# Altium PCB VIrtex_XC7vx690t_2ffg1927i_T_B.PcbDoc (part 3 of 5)
Units mm, origin at the board's own origin, x right, y up, seen from the top; angles counter-clockwise.
Board outline 230 x 148 mm, 12 copper layers (Top Layer 1, GND_IN_Layer, 1_V_IN_layer, 1.2_V_IN_layer, 1.8_V_IN_layer, 3.3_V_IN_layer, IN_Layer 6, IN_Layer 7, IN_Layer 8, IN_Layer 9, IN_Layer 10, Bottom Layer), stack 1.452 mm thick; 73 components, 655 nets, 2765 pads, 42 vias.
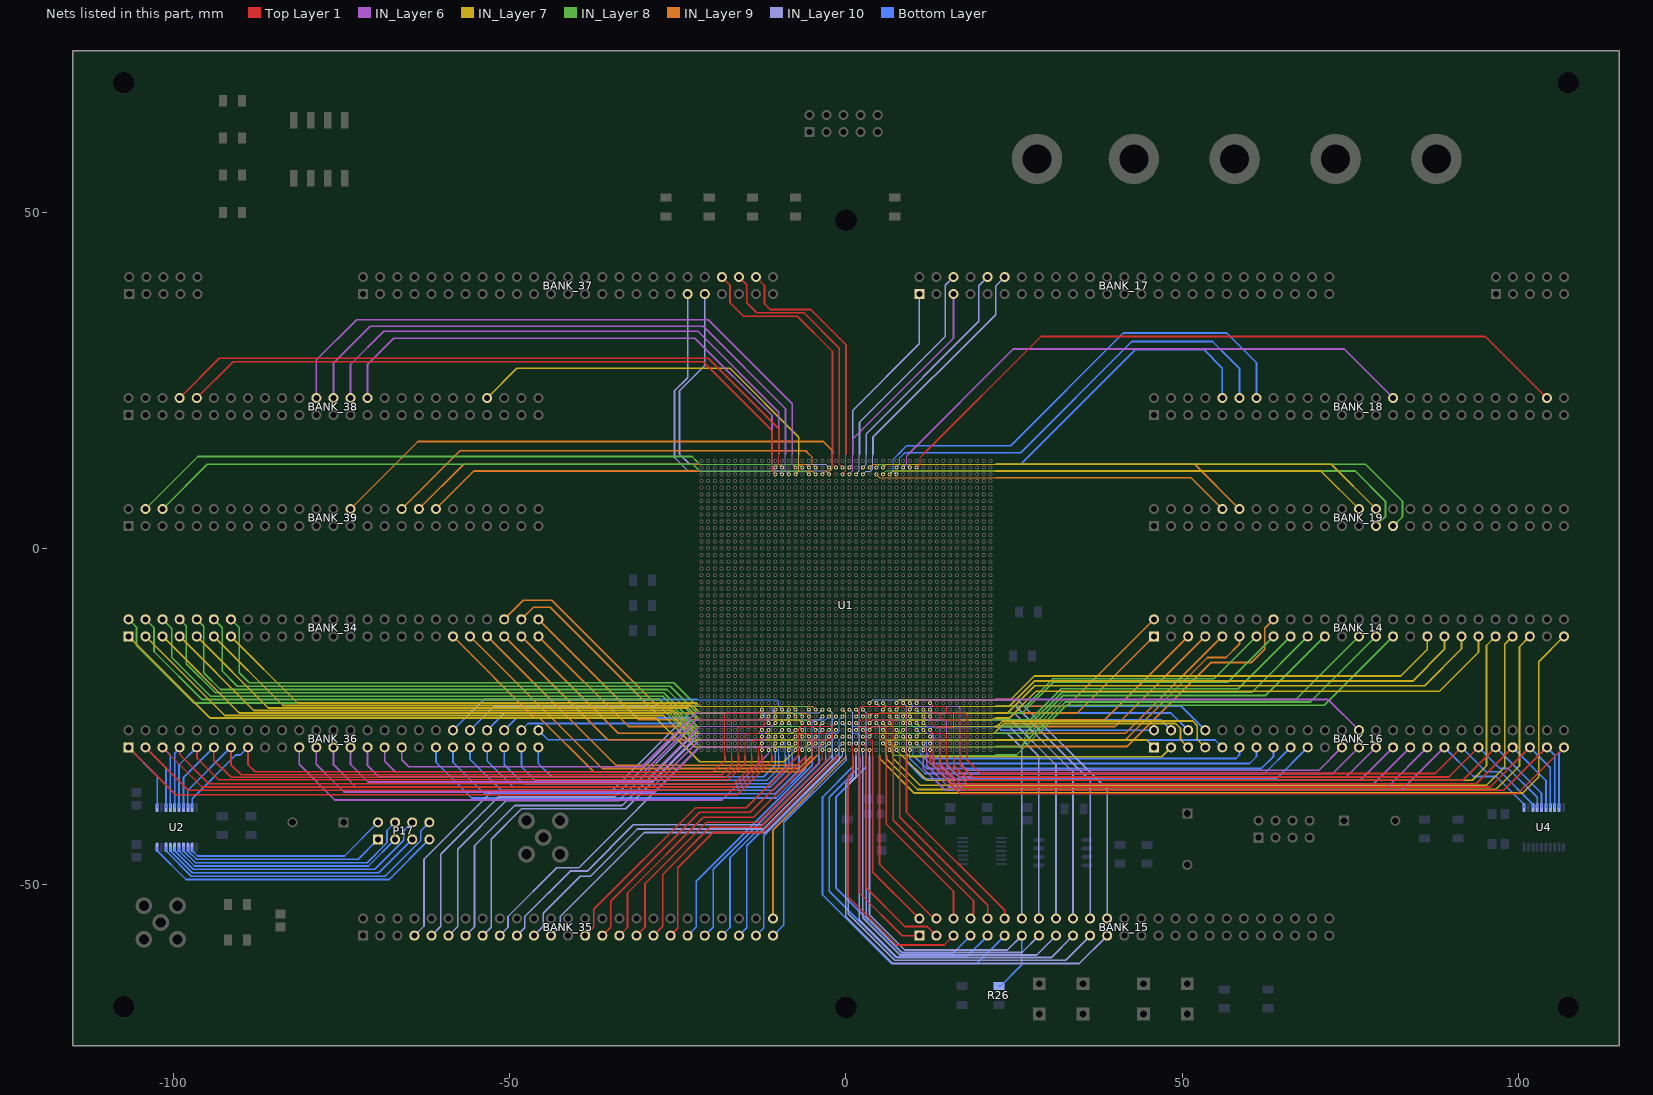
[diagram p13: the nets of this part, all layers, seen from the top]

## Via types
v1: diameter 0.8, hole 0.4, Top Layer 1 to Bottom Layer, 42 vias

## Nets (pads, with @x,y where several pads share a name; then routed paths per layer and width w, separated by ;. In a path a pad name is that pad's centre, name@x,y a point inside that pad or via, vN(x,y) a via of type N, cw(c..) or ccw(c..) an arc to the next point about the centre after c; other vN are vias at no path point) (continued)
AU26: BANK_15.24 U1.AU26 | length 60.3
  IN_Layer 10 w0.14: U1.AU26@3.5,-23 3.99,-22.51 22.3,-22.51
  IN_Layer 10 w0.254: 22.3,-22.51 25.51,-22.51 38.84,-35.84 BANK_15.24@38.84,-55.06
AU27: BANK_15.22 U1.AU27 | length 57.1
  IN_Layer 10 w0.14: U1.AU27@4.5,-23 4.99,-23.49 22.3,-23.49
  IN_Layer 10 w0.254: 22.3,-23.49 25.24,-23.49 36.3,-34.55 BANK_15.22@36.3,-55.06
AU28: BANK_14.13 U1.AU28 | length 60
  IN_Layer 8 w0.14: U1.AU28@5.5,-23 5.99,-23.49 22.3,-23.49
  IN_Layer 8 w0.254: 22.3,-23.49 26.704,-23.49 30.771,-19.423 54.717,-19.423 BANK_14.13@61.04,-13.1
AU30: BANK_14.33 U1.AU30 | length 84.2
  IN_Layer 7 w0.14: U1.AU30@7.5,-23 8.01,-22.49 22.3,-22.49
  IN_Layer 7 w0.254: 22.3,-22.49 24.51,-22.49 28,-19 82.5,-19 86.44,-15.06 BANK_14.33@86.44,-13.1
AU31: BANK_16.19 U1.AU31 | length 71.6
  Bottom Layer w0.14: U1.AU31@8.5,-23 9.01,-23.51 9.01,-30.9
  Bottom Layer w0.254: 9.01,-30.9 9.01,-31.76 11.5,-34.25 64.01,-34.25 BANK_16.19@68.66,-29.6
AU32: BANK_16.8 U1.AU32 | length 45.6
  Bottom Layer w0.14: U1.AU32@9.5,-23 9.99,-23.49 22.3,-23.49
  Bottom Layer w0.254: 22.3,-23.49 49.85,-23.49 BANK_16.8@53.42,-27.06
AU33: BANK_16.26 U1.AU33 | length 67.9
  IN_Layer 6 w0.14: U1.AU33@10.5,-23 11,-22.5 22.3,-22.5
  IN_Layer 6 w0.254: 22.3,-22.5 71.72,-22.5 BANK_16.26@76.28,-27.06
AU35: BANK_16.37 U1.AU35 U4.A2 | length 103.9
  Top Layer 1 w0.14: U1.AU35@12.5,-23 12.99,-23.49 14.74,-23.49 15,-23.75 15,-24.42 15.082,-24.503 17.753,-24.503 18.01,-24.76 18.01,-30.9
  Top Layer 1 w0.254: 18.01,-30.9 18.01,-31.51 20,-33.5 87.62,-33.5 BANK_16.37@91.52,-29.6
  Bottom Layer w0.254: BANK_16.37@91.52,-29.6 95.17,-33.25 97.318,-33.25 102.125,-38.057 U4.A2@102.125,-38.55
AV10: BANK_36.15 U1.AV10 U2.A8 | length 100
  Top Layer 1 w0.14: -17.996,-30.898 -17.996,-24.758 -17.738,-24.5 -13,-24.5 U1.AV10@-12.5,-24
  Top Layer 1 w0.254: BANK_36.15@-88.92,-29.6 -88.92,-32.183 -87.853,-33.25 -19.738,-33.25 -17.996,-31.508 -17.996,-30.898
  Bottom Layer w0.254: U2.A8@-97.225,-38.55 -97.225,-37.225 -90.75,-30.75 -90.07,-30.75 BANK_36.15@-88.92,-29.6
AV12: BANK_36.33 U1.AV12 | length 61.4
  IN_Layer 6 w0.14: -22.1,-24.49 -10.99,-24.49 U1.AV12@-10.5,-24
  IN_Layer 6 w0.254: BANK_36.33@-66.06,-29.6 -66.06,-31.44 -65,-32.5 -30.365,-32.5 -22.355,-24.49 -22.1,-24.49
AV13: BANK_36.40 U1.AV13 | length 51.9
  Bottom Layer w0.14: -22.1,-22.5 -10.307,-22.5 -9.99,-22.817 -9.99,-23.51 U1.AV13@-9.5,-24
  Bottom Layer w0.254: BANK_36.40@-58.44,-27.06 -53.88,-22.5 -22.1,-22.5
AV14: BANK_36.42 U1.AV14 | length 49.7
  Bottom Layer w0.14: -22.1,-23.51 -11.297,-23.51 -11,-23.807 -11,-24.193 -10.703,-24.49 -8.993,-24.49 -8.503,-24 U1.AV14@-8.5,-24
  Bottom Layer w0.254: BANK_36.42@-55.9,-27.06 -52.35,-23.51 -22.1,-23.51
AV15: BANK_34.13 U1.AV15 | length 88.5
  IN_Layer 7 w0.14: -22.1,-23.093 -21.703,-23.49 -8.01,-23.49 U1.AV15@-7.5,-24
  IN_Layer 7 w0.254: BANK_34.13@-91.46,-13.1 -81.554,-23.006 -22.187,-23.006 -22.1,-23.093
AV17: BANK_34.14 U1.AV17 | length 95.5
  IN_Layer 8 w0.14: -22.1,-23.49 -6.01,-23.49 U1.AV17@-5.5,-24
  IN_Layer 8 w0.254: BANK_34.14@-91.46,-10.56 -90.236,-11.784 -90.236,-18.514 -88.75,-20 -25.59,-20 -22.1,-23.49
AV18: BANK_34.46 U1.AV18 | length 54.2
  IN_Layer 9 w0.14: -22.1,-23.49 -5.01,-23.49 U1.AV18@-4.5,-24
  IN_Layer 9 w0.254: BANK_34.46@-50.82,-10.56 -48.01,-7.75 -43.75,-7.75 -28.01,-23.49 -22.1,-23.49
AV19: BANK_35.7 U1.AV19 | length 80.4
  IN_Layer 10 w0.14: -22.1,-24.49 -3.99,-24.49 U1.AV19@-3.5,-24
  IN_Layer 10 w0.254: BANK_35.7@-64.18,-57.6 -62.75,-56.17 -62.75,-46.25 -52.75,-36.25 -35,-36.25 -23.24,-24.49 -22.1,-24.49
AV20: BANK_35.19 U1.AV20 | length 66
  IN_Layer 10 w0.14: U1.AV20@-2.5,-24 -2.01,-24.49 -2.01,-30.76 -2.15,-30.9
  IN_Layer 10 w0.254: BANK_35.19@-48.94,-57.6 -47.75,-56.41 -47.75,-54.75 -41,-48 -38.5,-48 -31.626,-41.126 -12.376,-41.126 -2.15,-30.9
AV22: BANK_35.50 U1.AV22 | length 35.7
  IN_Layer 9 w0.14: U1.AV22@-0.5,-24 -0.01,-24.49 -0.01,-30.9 -0.01,-31.01
  IN_Layer 9 w0.254: BANK_35.50@-10.84,-55.06 -10.84,-41.84 -0.01,-31.01
AV23: BANK_15.23 U1.AV23 | length 74.9
  IN_Layer 10 w0.14: U1.AV23@0.5,-24 0.99,-24.49 0.99,-30.9
  IN_Layer 10 w0.254: 0.99,-30.9 0.99,-33.981 -0.021,-34.992 -0.021,-54.758 6.971,-61.75 34.69,-61.75 BANK_15.23@38.84,-57.6
AV24: BANK_15.19 U1.AV24 | length 66.9
  IN_Layer 10 w0.14: U1.AV24@1.5,-24 1.99,-24.49 1.99,-30.9
  IN_Layer 10 w0.254: 1.99,-30.9 1.99,-55.24 7.615,-60.865 30.495,-60.865 BANK_15.19@33.76,-57.6
AV25: BANK_15.15 U1.AV25 | length 59.9
  IN_Layer 10 w0.14: U1.AV25@2.5,-24 2.99,-24.49 2.99,-30.9
  IN_Layer 10 w0.254: 2.99,-30.9 2.99,-54.74 8.367,-60.117 26.163,-60.117 BANK_15.15@28.68,-57.6
AV28: BANK_14.2 U1.AV28 | length 45.9
  IN_Layer 9 w0.14: U1.AV28@5.5,-24 6.01,-23.49 22.3,-23.49
  IN_Layer 9 w0.254: 22.3,-23.49 32.87,-23.49 BANK_14.2@45.8,-10.56
AV29: BANK_14.15 U1.AV29 | length 62
  IN_Layer 8 w0.14: U1.AV29@6.5,-24 6.99,-24.49 22.3,-24.49
  IN_Layer 8 w0.254: 22.3,-24.49 26.233,-24.49 30.815,-19.908 56.772,-19.908 BANK_14.15@63.58,-13.1
AV30: BANK_14.35 U1.AV30 | length 87.1
  IN_Layer 7 w0.14: U1.AV30@7.5,-24 8.01,-23.49 22.3,-23.49
  IN_Layer 7 w0.254: 22.3,-23.49 24.26,-23.49 28,-19.75 84.25,-19.75 88.98,-15.02 BANK_14.35@88.98,-13.1
AV32: BANK_16.23 U1.AV32 | length 74.6
  IN_Layer 6 w0.14: U1.AV32@9.5,-24 9.99,-23.51 16.703,-23.51 16.99,-23.797 16.99,-30.9
  IN_Layer 6 w0.254: 16.99,-30.9 16.99,-31.99 18,-33 70.34,-33 BANK_16.23@73.74,-29.6
AV33: BANK_16.6 U1.AV33 | length 41.6
  Bottom Layer w0.14: U1.AV33@10.5,-24 11.01,-24.51 22.3,-24.51
  Bottom Layer w0.254: 22.3,-24.51 48.33,-24.51 BANK_16.6@50.88,-27.06
AV34: BANK_16.25 U1.AV34 | length 74.9
  IN_Layer 6 w0.14: U1.AV34@11.5,-24 11.99,-24.49 15.861,-24.49 16.01,-24.639 16.01,-30.9
  IN_Layer 6 w0.254: 16.01,-30.9 16.01,-32.361 17.149,-33.5 72.38,-33.5 BANK_16.25@76.28,-29.6
AV35: BANK_16.39 U1.AV35 U4.A3 | length 104.9
  Top Layer 1 w0.14: U1.AV35@12.5,-24 12.99,-24.49 13.74,-24.49 13.998,-24.748 13.998,-25.248 14.25,-25.5 16.75,-25.5 16.99,-25.74 16.99,-30.9
  Top Layer 1 w0.254: 16.99,-30.9 16.99,-32.24 18.75,-34 89.66,-34 BANK_16.39@94.06,-29.6
  Bottom Layer w0.254: BANK_16.39@94.06,-29.6 97.21,-32.75 98.5,-32.75 102.775,-37.025 U4.A3@102.775,-38.55
AW10: BANK_36.13 U1.AW10 U2.A7 | length 101.2
  Top Layer 1 w0.14: -17,-30.9 -17,-25.762 -16.738,-25.5 -13,-25.5 U1.AW10@-12.5,-25
  Top Layer 1 w0.254: BANK_36.13@-91.46,-29.6 -91.46,-32.183 -89.95,-33.693 -18.431,-33.693 -17,-32.262 -17,-30.9
  Bottom Layer w0.254: U2.A7@-97.875,-38.55 -97.875,-36.015 BANK_36.13@-91.46,-29.6
AW11: BANK_36.11 U1.AW11 U2.A6 | length 103.8
  Top Layer 1 w0.14: -15.996,-30.898 -15.996,-26.59 -15.914,-26.508 -12.315,-26.508 -12.01,-26.203 -12.01,-25.51 U1.AW11@-11.5,-25
  Top Layer 1 w0.254: BANK_36.11@-94,-29.6 -94,-31.5 -91.433,-34.067 -17.805,-34.067 -15.996,-32.258 -15.996,-30.898
  Bottom Layer w0.254: U2.A6@-98.525,-38.55 -98.525,-34.125 BANK_36.11@-94,-29.6
AW12: BANK_36.31 U1.AW12 | length 64.2
  IN_Layer 6 w0.14: -22.1,-25.5 -11,-25.5 U1.AW12@-10.5,-25
  IN_Layer 6 w0.254: BANK_36.31@-68.6,-29.6 -68.6,-31.65 -67.002,-33.248 -29.998,-33.248 -22.25,-25.5 -22.1,-25.5
AW14: BANK_36.44 U1.AW14 | length 46.8
  Bottom Layer w0.14: -22.1,-24.51 -12.297,-24.51 -12.01,-24.797 -12.01,-25.24 -11.76,-25.49 -8.99,-25.49 U1.AW14@-8.5,-25
  Bottom Layer w0.254: BANK_36.44@-53.36,-27.06 -50.81,-24.51 -22.1,-24.51
AW15: BANK_34.11 U1.AW15 | length 91.4
  IN_Layer 7 w0.14: -22.1,-24.093 -21.703,-24.49 -8.01,-24.49 U1.AW15@-7.5,-25
  IN_Layer 7 w0.254: BANK_34.11@-94,-13.1 -83.72,-23.38 -22.813,-23.38 -22.1,-24.093
AW16: BANK_34.12 U1.AW16 | length 97.3
  IN_Layer 8 w0.14: -22.1,-24.51 -6.99,-24.51 U1.AW16@-6.5,-25
  IN_Layer 8 w0.254: BANK_34.12@-94,-10.56 -92.75,-11.81 -92.75,-18.25 -90.5,-20.5 -26.11,-20.5 -22.1,-24.51
AW17: BANK_34.48 U1.AW17 | length 50.3
  IN_Layer 9 w0.14: -22.1,-24.51 -5.99,-24.51 U1.AW17@-5.5,-25
  IN_Layer 9 w0.254: BANK_34.48@-48.28,-10.56 -46.47,-8.75 -44,-8.75 -28.24,-24.51 -22.1,-24.51
AW19: BANK_35.9 U1.AW19 | length 77.9
  IN_Layer 10 w0.14: -22.1,-25.49 -3.99,-25.49 U1.AW19@-3.5,-25
  IN_Layer 10 w0.254: BANK_35.9@-61.64,-57.6 -60.25,-56.21 -60.25,-45.5 -51.75,-37 -34.5,-37 -22.99,-25.49 -22.1,-25.49
AW20: BANK_35.39 U1.AW20 | length 42.3
  Bottom Layer w0.14: -5,-30.9 -5,-25.807 -4.683,-25.49 -2.99,-25.49 U1.AW20@-2.5,-25
  Bottom Layer w0.254: BANK_35.39@-23.54,-57.6 -22.25,-56.31 -22.25,-49.5 -5,-32.25 -5,-30.9
AW21: BANK_35.41 U1.AW21 | length 41.5
  Bottom Layer w0.14: -4,-30.9 -4,-26.807 -3.683,-26.49 -2.297,-26.49 -1.99,-26.183 -1.99,-25.49 U1.AW21@-1.5,-25
  Bottom Layer w0.254: BANK_35.41@-21,-57.6 -21,-57.587 -19.75,-56.337 -19.75,-47.75 -4,-32 -4,-30.9
AW22: BANK_35.43 U1.AW22 | length 40.9
  Bottom Layer w0.14: -3,-30.9 -3,-27.807 -2.683,-27.49 -1.297,-27.49 -0.99,-27.183 -0.99,-25.49 U1.AW22@-0.5,-25
  Bottom Layer w0.254: BANK_35.43@-18.46,-57.6 -17.25,-56.39 -17.25,-46 -3,-31.75 -3,-30.9
AW24: BANK_15.12 U1.AW24 | length 46
  Top Layer 1 w0.14: U1.AW24@1.5,-25 1.99,-24.51 1.99,-23.817 2.297,-23.51 8.851,-23.51 8.99,-23.649 8.99,-30.9
  Top Layer 1 w0.254: 8.99,-30.9 8.99,-39.24 23.6,-53.85 BANK_15.12@23.6,-55.06
AW25: BANK_15.10 U1.AW25 | length 41.6
  Top Layer 1 w0.14: U1.AW25@2.5,-25 2.99,-24.51 7.851,-24.51 7.99,-24.649 7.99,-30.9
  Top Layer 1 w0.254: 7.99,-30.9 7.99,-39.99 21.06,-53.06 BANK_15.10@21.06,-55.06
AW26: BANK_15.20 U1.AW26 | length 55.9
  IN_Layer 10 w0.14: U1.AW26@3.5,-25 4,-24.5 22.3,-24.5
  IN_Layer 10 w0.254: 22.3,-24.5 25,-24.5 33.76,-33.26 BANK_15.20@33.76,-55.06
AW27: BANK_14.1 U1.AW27 | length 46.2
  IN_Layer 9 w0.14: U1.AW27@4.5,-25 5.01,-24.49 22.3,-24.49
  IN_Layer 9 w0.254: 22.3,-24.49 34.41,-24.49 BANK_14.1@45.8,-13.1
AW29: BANK_14.5 U1.AW29 | length 49.7
  IN_Layer 9 w0.14: U1.AW29@6.5,-25 6.99,-25.49 22.3,-25.49
  IN_Layer 9 w0.254: 22.3,-25.49 38.49,-25.49 BANK_14.5@50.88,-13.1
AW30: BANK_14.17 U1.AW30 | length 64
  IN_Layer 8 w0.14: U1.AW30@7.5,-25 8.01,-25.51 22.3,-25.51
  IN_Layer 8 w0.254: 22.3,-25.51 27.378,-25.51 31.996,-20.893 58.327,-20.893 BANK_14.17@66.12,-13.1
AW31: BANK_14.37 U1.AW31 | length 89
  IN_Layer 7 w0.14: U1.AW31@8.5,-25 8.99,-24.51 22.3,-24.51
  IN_Layer 7 w0.254: 22.3,-24.51 23.99,-24.51 28.077,-20.423 86.047,-20.423 91.52,-14.95 BANK_14.37@91.52,-13.1
AW32: BANK_16.4 U1.AW32 | length 39.7
  Bottom Layer w0.14: U1.AW32@9.5,-25 10.01,-25.51 22.3,-25.51
  Bottom Layer w0.254: 22.3,-25.51 46.79,-25.51 BANK_16.4@48.34,-27.06
AW34: BANK_16.27 U1.AW34 | length 76.7
  IN_Layer 6 w0.14: U1.AW34@11.5,-25 11.99,-25.49 14.74,-25.49 14.99,-25.74 14.99,-30.9
  IN_Layer 6 w0.254: 14.99,-30.9 14.99,-32.24 16.75,-34 74.42,-34 BANK_16.27@78.82,-29.6
AW35: BANK_16.41 U1.AW35 U4.A4 | length 105.5
  Top Layer 1 w0.14: U1.AW35@12.5,-25 12.99,-25.49 12.99,-26.24 13.26,-26.51 15.703,-26.51 16.01,-26.817 16.01,-30.9
  Top Layer 1 w0.254: 16.01,-30.9 16.01,-32.26 18.25,-34.5 91.7,-34.5 BANK_16.41@96.6,-29.6
  Bottom Layer w0.254: BANK_16.41@96.6,-29.6 103.425,-36.425 U4.A4@103.425,-38.55
AY11: BANK_36.1 U1.AY11 U2.A1 | length 117.2
  Top Layer 1 w0.14: U1.AY11@-11.5,-26 -11.01,-26.49 -11.01,-30.9
  Top Layer 1 w0.254: BANK_36.1@-106.7,-29.6 -99.643,-36.657 -16.157,-36.657 -11.01,-31.51 -11.01,-30.9
  Bottom Layer w0.254: BANK_36.1@-106.7,-29.6 -102.425,-33.875 U2.A1@-102.425,-38.55
AY12: BANK_36.29 U1.AY12 | length 67.4
  IN_Layer 6 w0.14: -22.1,-26.887 -21.703,-26.49 -10.99,-26.49 U1.AY12@-10.5,-26
  IN_Layer 6 w0.254: BANK_36.29@-71.14,-29.6 -71.14,-32.36 -69.5,-34 -29.213,-34 -22.1,-26.887
AY13: BANK_36.46 U1.AY13 | length 42.8
  Bottom Layer w0.14: -22.1,-26.5 -10,-26.5 U1.AY13@-9.5,-26
  Bottom Layer w0.254: BANK_36.46@-50.82,-27.06 -49.01,-25.25 -23.35,-25.25 -22.1,-26.5
AY14: BANK_36.37 U1.AY14 | length 69.9
  Bottom Layer w0.14: U1.AY14@-8.5,-26 -8,-26.5 -6.307,-26.5 -6,-26.807 -6,-30.9
  Bottom Layer w0.254: BANK_36.37@-60.98,-29.6 -60.98,-31.77 -55.626,-37.124 -10.403,-37.124 -6,-32.721 -6,-30.9
AY16: BANK_34.9 U1.AY16 | length 95.4
  IN_Layer 7 w0.14: -22.1,-25.093 -21.703,-25.49 -7.01,-25.49 U1.AY16@-6.5,-26
  IN_Layer 7 w0.254: BANK_34.9@-96.54,-13.1 -85.886,-23.754 -23.439,-23.754 -22.1,-25.093
AY17: BANK_34.10 U1.AY17 | length 101.5
  IN_Layer 8 w0.14: -22.1,-25.51 -5.99,-25.51 U1.AY17@-5.5,-26
  IN_Layer 8 w0.254: BANK_34.10@-96.54,-10.56 -95.5,-11.6 -95.5,-18.5 -93,-21 -26.61,-21 -22.1,-25.51
AY18: BANK_34.50 U1.AY18 | length 47.6
  IN_Layer 9 w0.14: -22.1,-25.49 -5.01,-25.49 U1.AY18@-4.5,-26
  IN_Layer 9 w0.254: BANK_34.50@-45.74,-10.56 -30.81,-25.49 -22.1,-25.49
AY19: BANK_35.11 U1.AY19 | length 75.4
  IN_Layer 10 w0.14: -22.1,-26.49 -3.99,-26.49 U1.AY19@-3.5,-26
  IN_Layer 10 w0.254: BANK_35.11@-59.1,-57.6 -57.75,-56.25 -57.75,-44.75 -50.5,-37.5 -33.75,-37.5 -22.74,-26.49 -22.1,-26.49
AY21: BANK_35.27 U1.AY21 | length 54.2
  Top Layer 1 w0.14: -7.15,-30.9 -7,-30.75 -7,-26.807 -6.683,-26.49 -1.99,-26.49 U1.AY21@-1.5,-26
  Top Layer 1 w0.254: BANK_35.27@-38.78,-57.6 -37.5,-56.32 -37.5,-53.682 -22.38,-38.562 -14.812,-38.562 -7.15,-30.9
AY22: BANK_35.49 U1.AY22 | length 36.3
  Bottom Layer w0.14: U1.AY22@-0.5,-26 0,-26.5 0,-30.9
  Bottom Layer w0.254: BANK_35.49@-10.84,-57.6 -9.25,-56.01 -9.25,-40.75 0,-31.5 0,-30.9
AY23: BANK_15.7 U1.AY23 | length 53.5
  Bottom Layer w0.14: U1.AY23@0.5,-26 0.99,-26.49 2.683,-26.49 3,-26.807 3,-31
  Bottom Layer w0.254: 3,-31 3,-32.5 -1.5,-37 -1.5,-50.5 8.25,-60.25 15.87,-60.25 BANK_15.7@18.52,-57.6
AY24: BANK_15.8 U1.AY24 | length 40.2
  Top Layer 1 w0.14: U1.AY24@1.5,-26 1.566,-25.934 1.873,-25.934 2.297,-25.51 6.703,-25.51 7.01,-25.817 7.01,-30.9
  Top Layer 1 w0.254: 7.01,-30.9 7.01,-40.429 18.948,-52.367 18.948,-54.295 18.52,-54.723 BANK_15.8@18.52,-55.06
AY26: BANK_15.18 U1.AY26 | length 53.6
  IN_Layer 10 w0.14: U1.AY26@3.5,-26 4,-25.5 22.3,-25.5
  IN_Layer 10 w0.254: 22.3,-25.5 24.5,-25.5 31.22,-32.22 BANK_15.18@31.22,-55.06
AY27: BANK_14.11 U1.AY27 | length 63.2
  IN_Layer 9 w0.14: U1.AY27@4.5,-26 4.99,-26.49 4.99,-28.351 5.139,-28.5 22.3,-28.5
  IN_Layer 9 w0.254: 22.3,-28.5 41.5,-28.5 53.75,-16.25 56.5,-16.25 58.5,-14.25 BANK_14.11@58.5,-13.1
AY28: BANK_14.7 U1.AY28 | length 53.7
  IN_Layer 9 w0.14: U1.AY28@5.5,-26 6,-26.5 22.3,-26.5
  IN_Layer 9 w0.254: 22.3,-26.5 40.02,-26.5 BANK_14.7@53.42,-13.1
AY29: BANK_14.19 U1.AY29 | length 67.9
  IN_Layer 8 w0.14: U1.AY29@6.5,-26 6.99,-26.49 22.3,-26.49
  IN_Layer 8 w0.254: 22.3,-26.49 27.043,-26.49 32.148,-21.385 60.375,-21.385 BANK_14.19@68.66,-13.1
AY31: BANK_14.39 U1.AY31 | length 92.3
  IN_Layer 7 w0.14: U1.AY31@8.5,-26 9.01,-25.49 21.703,-25.49 21.943,-25.25 22.3,-25.25
  IN_Layer 7 w0.254: 22.3,-25.25 24.25,-25.25 28.25,-21.25 88.25,-21.25 94.06,-15.44 BANK_14.39@94.06,-13.1
AY32: BANK_16.2 U1.AY32 | length 36.7
  Bottom Layer w0.14: U1.AY32@9.5,-26 10.01,-26.51 22.3,-26.51
  Bottom Layer w0.254: 22.3,-26.51 22.51,-26.51 23.06,-27.06 BANK_16.2@45.8,-27.06
AY33: BANK_16.7 U1.AY33 | length 46.3
  IN_Layer 7 w0.14: U1.AY33@10.5,-26 10.99,-26.49 22.3,-26.49
  IN_Layer 7 w0.254: 22.3,-26.49 22.481,-26.49 23.282,-25.689 51.54,-25.689 52.25,-26.399 52.25,-28.43 BANK_16.7@53.42,-29.6
AY34: BANK_16.29 U1.AY34 | length 78.6
  IN_Layer 6 w0.14: U1.AY34@11.5,-26 11.99,-26.49 13.683,-26.49 13.99,-26.797 13.99,-30.9
  IN_Layer 6 w0.254: 13.99,-30.9 13.99,-32.24 16.25,-34.5 76.46,-34.5 BANK_16.29@81.36,-29.6
B1: P17.7 U2.B1 | length 45.2
  Bottom Layer w0.254: U2.B1@-102.425,-44.45 -102.425,-44.962 -98.137,-49.25 -67.92,-49.25 P17.7@-61.96,-43.29
B2: P17.8 U2.B2 | length 45.4
  Bottom Layer w0.254: U2.B2@-101.125,-44.45 -101.125,-44.962 -97.337,-48.75 -68.55,-48.75 -63.25,-43.45 -63.25,-42.04 P17.8@-61.96,-40.75
B3: P17.5 U2.B3 | length 39.9
  Bottom Layer w0.254: U2.B3@-100.475,-44.45 -100.475,-44.962 -97.187,-48.25 -69.46,-48.25 P17.5@-64.5,-43.29
B4: P17.6 U2.B4 | length 40.7
  Bottom Layer w0.254: U2.B4@-99.825,-44.45 -99.825,-44.962 -97.037,-47.75 -70.09,-47.75 -65.75,-43.41 -65.75,-42 P17.6@-64.5,-40.75
B5: P17.3 U2.B5 | length 35.2
  Bottom Layer w0.254: U2.B5@-99.175,-44.45 -99.175,-44.962 -96.887,-47.25 -71,-47.25 P17.3@-67.04,-43.29
B6: P17.4 U2.B6 | length 36.3
  Bottom Layer w0.254: U2.B6@-98.525,-44.45 -98.525,-44.962 -96.737,-46.75 -71.191,-46.75 -68.25,-43.809 -68.25,-41.96 P17.4@-67.04,-40.75
B7: P17.1 U2.B7 | length 30.6
  Bottom Layer w0.254: U2.B7@-97.875,-44.45 -97.875,-44.962 -96.587,-46.25 -72.54,-46.25 P17.1@-69.58,-43.29
B8: P17.2 U2.B8 | length 30.6
  Bottom Layer w0.254: U2.B8@-97.225,-44.45 -97.225,-44.962 -96.437,-45.75 -74.58,-45.75 P17.2@-69.58,-40.75
B12: BANK_38.8 U1.B12 | length 101.8
  Top Layer 1 w0.14: U1.B12@-10.5,12 -10.01,12.49 -10.01,14
  Top Layer 1 w0.254: BANK_38.8@-99.08,22.34 -93.17,28.25 -20.5,28.25 -10.01,17.76 -10.01,14
B13: BANK_38.28 U1.B13 | length 84.1
  IN_Layer 6 w0.14: -10,14 -10,12.5 U1.B13@-9.5,12
  IN_Layer 6 w0.254: BANK_38.28@-73.68,22.34 -73.68,27.32 -68.75,32.25 -22,32.25 -10,20.25 -10,14
B15: BANK_38.24 U1.B15 | length 93.8
  IN_Layer 6 w0.14: -8,14 -8,12.5 U1.B15@-7.5,12
  IN_Layer 6 w0.254: BANK_38.24@-78.76,22.34 -78.76,27.99 -72.75,34 -20.5,34 -8,21.5 -8,14
B16: BANK_39.4 U1.B16 | length 101.6
  IN_Layer 8 w0.14: -22.1,12.85 -21.76,12.51 -7.01,12.51 U1.B16@-6.5,12
  IN_Layer 8 w0.254: BANK_39.4@-104.16,5.84 -96.353,13.647 -22.897,13.647 -22.1,12.85
B17: BANK_39.36 U1.B17 | length 61
  IN_Layer 9 w0.14: -22.1,12.51 -6.01,12.51 U1.B17@-5.5,12
  IN_Layer 9 w0.254: BANK_39.36@-63.52,5.84 -56.85,12.51 -22.1,12.51
B18: BANK_39.34 U1.B18 | length 66.8
  IN_Layer 9 w0.14: -5.5,14 -5.01,13.51 -5.01,12.51 U1.B18@-4.5,12
  IN_Layer 9 w0.254: BANK_39.34@-66.06,5.84 -57.4,14.5 -6,14.5 -5.5,14
B20: BANK_37.41 U1.B20 | length 48.4
  IN_Layer 10 w0.14: -22.1,12.5 -3,12.5 U1.B20@-2.5,12
  IN_Layer 10 w0.254: -22.1,12.5 -23.25,12.5 -24.75,14 -24.75,23.432 -21,27.182 BANK_37.41@-21,37.8
B21: BANK_37.44 U1.B21 | length 40.1
  Top Layer 1 w0.14: -2,14 -2,12.5 U1.B21@-1.5,12
  Top Layer 1 w0.254: BANK_37.44@-18.46,40.34 -17.25,39.13 -17.25,36.5 -15.25,34.5 -7.25,34.5 -2,29.25 -2,14
B22: BANK_37.46 U1.B22 | length 38.8
  Top Layer 1 w0.14: -1,14 -1,12.5 U1.B22@-0.5,12
  Top Layer 1 w0.254: BANK_37.46@-15.92,40.34 -14.75,39.17 -14.75,36.5 -13.25,35 -6.25,35 -1,29.75 -1,14
B23: BANK_17.1 U1.B23 | length 30.1
  IN_Layer 10 w0.14: U1.B23@0.5,12 1,12.5 1,14
  IN_Layer 10 w0.254: 1,14 1,20.488 10.9,30.389 BANK_17.1@10.9,37.8
B25: BANK_17.10 U1.B25 | length 36
  IN_Layer 10 w0.14: U1.B25@2.5,12 3,12.5 3,14
  IN_Layer 10 w0.254: 3,14 3,17 19.75,33.75 19.75,39.03 BANK_17.10@21.06,40.34
B26: BANK_19.12 U1.B26 | length 58
  IN_Layer 9 w0.14: U1.B26@3.5,12 3.99,12.49 22.3,12.49
  IN_Layer 9 w0.254: 22.3,12.49 51.85,12.49 BANK_19.12@58.5,5.84
B27: BANK_19.29 U1.B27 | length 85
  IN_Layer 8 w0.14: U1.B27@4.5,12 5,12.5 22.297,12.5
  IN_Layer 8 w0.254: 22.297,12.5 77.25,12.5 82.75,7 82.75,4.69 BANK_19.29@81.36,3.3
B28: BANK_19.28 U1.B28 | length 76.3
  IN_Layer 7 w0.14: U1.B28@5.5,12 6,12.5 22.25,12.5
  IN_Layer 7 w0.254: 22.25,12.5 72.16,12.5 BANK_19.28@78.82,5.84
B30: BANK_18.12 U1.B30 | length 65.4
  Bottom Layer w0.14: U1.B30@7.5,12 8.01,12.51 8.01,13.465 8.545,14
  Bottom Layer w0.254: 8.545,14 8.766,14.221 25.971,14.221 42.5,30.75 54.5,30.75 56.912,28.338 58.5,26.75 BANK_18.12@58.5,22.34
B31: BANK_18.10 U1.B31 | length 60.3
  Bottom Layer w0.14: U1.B31@8.5,12 8.99,12.49 22.3,12.49
  Bottom Layer w0.254: 22.3,12.49 25.99,12.49 43,29.5 53.25,29.5 55.96,26.79 BANK_18.10@55.96,22.34
B32: BANK_18.30 U1.B32 | length 83.9
  IN_Layer 6 w0.14: 9.25,14 9.01,13.76 9.01,12.49 U1.B32@9.5,12
  IN_Layer 6 w0.254: 9.25,14 24.878,29.628 74.072,29.628 BANK_18.30@81.36,22.34
B33: BANK_18.48 U1.B33 | length 106.2
  Top Layer 1 w0.14: U1.B33@10.5,12 11.01,12.51 11.01,13.51 11.5,14
  Top Layer 1 w0.254: 11.5,14 29,31.5 95.06,31.5 BANK_18.48@104.22,22.34
BA10: BANK_36.9 U1.BA10 U2.A5 | length 102.6
  Top Layer 1 w0.14: -15.01,-30.9 -15.01,-27.817 -14.683,-27.49 -13.023,-27.49 -12.533,-27 U1.BA10@-12.5,-27
  Top Layer 1 w0.254: BANK_36.9@-96.54,-29.6 -96.507,-29.633 -96.507,-31.243 -93.309,-34.441 -17.466,-34.441 -15.01,-31.985 -15.01,-30.9
  Bottom Layer w0.254: U2.A5@-99.175,-38.55 -99.175,-32.235 BANK_36.9@-96.54,-29.6
BA11: BANK_36.27 U1.BA11 | length 69
  IN_Layer 6 w0.14: -22.1,-27.85 -21.74,-27.49 -11.99,-27.49 U1.BA11@-11.5,-27
  IN_Layer 6 w0.254: BANK_36.27@-73.68,-29.6 -73.68,-32.14 -71.07,-34.75 -29,-34.75 -22.1,-27.85
BA13: BANK_36.48 U1.BA13 | length 40
  Bottom Layer w0.14: -22.1,-27.5 -10,-27.5 U1.BA13@-9.5,-27
  Bottom Layer w0.254: BANK_36.48@-48.28,-27.06 -47.283,-26.063 -24.187,-26.063 -22.75,-27.5 -22.1,-27.5
BA14: BANK_36.39 U1.BA14 | length 64.2
  Bottom Layer w0.14: U1.BA14@-8.5,-27 -8,-27.5 -7.082,-27.5 -7,-27.582 -7,-30.9
  Bottom Layer w0.254: BANK_36.39@-58.44,-29.6 -58.44,-31.81 -53.75,-36.5 -10.496,-36.5 -7,-33.004 -7,-30.9
BA15: BANK_34.7 U1.BA15 | length 97.7
  IN_Layer 7 w0.14: -22.1,-27.49 -7.99,-27.49 U1.BA15@-7.5,-27
  IN_Layer 7 w0.254: BANK_34.7@-99.08,-13.1 -88.052,-24.128 -25.622,-24.128 -22.26,-27.49 -22.1,-27.49
BA16: BANK_34.8 U1.BA16 | length 102.7
  IN_Layer 8 w0.14: -22.1,-26.474 -22.084,-26.49 -7.01,-26.49 U1.BA16@-6.5,-27
  IN_Layer 8 w0.254: BANK_34.8@-99.08,-10.56 -98.083,-11.557 -98.083,-17.167 -93.75,-21.5 -27.074,-21.5 -22.1,-26.474
BA18: BANK_34.49 U1.BA18 | length 47
  IN_Layer 9 w0.14: -22.1,-26.49 -5.01,-26.49 U1.BA18@-4.5,-27
  IN_Layer 9 w0.254: BANK_34.49@-45.74,-13.1 -32.35,-26.49 -22.1,-26.49
BA19: BANK_35.13 U1.BA19 | length 72.8
  IN_Layer 10 w0.14: -22.1,-27.51 -4.01,-27.51 U1.BA19@-3.5,-27
  IN_Layer 10 w0.254: BANK_35.13@-56.56,-57.6 -55.25,-56.29 -55.25,-44.25 -49.25,-38.25 -33.25,-38.25 -22.51,-27.51 -22.1,-27.51
BA20: BANK_35.29 U1.BA20 | length 50.5
  Top Layer 1 w0.14: -6,-31 -6,-27.807 -5.683,-27.49 -2.99,-27.49 U1.BA20@-2.5,-27
  Top Layer 1 w0.254: BANK_35.29@-36.24,-57.6 -35,-56.36 -35,-52.5 -21.75,-39.25 -14.25,-39.25 -6,-31
BA21: BANK_35.31 U1.BA21 | length 49.7
  Top Layer 1 w0.14: -5,-31 -5,-28.807 -4.683,-28.49 -2.297,-28.49 -1.99,-28.183 -1.99,-27.49 U1.BA21@-1.5,-27
  Top Layer 1 w0.254: BANK_35.31@-33.7,-57.6 -32.5,-56.4 -32.5,-51.25 -21.25,-40 -13.75,-40 -5,-31.25 -5,-31
BA23: BANK_15.9 U1.BA23 | length 55.8
  Bottom Layer w0.14: U1.BA23@0.5,-27 0.99,-27.49 1.683,-27.49 2,-27.807 2,-31.25
  Bottom Layer w0.254: 2,-31.25 2,-32.5 -2.5,-37 -2.5,-51 7.278,-60.778 17.882,-60.778 BANK_15.9@21.06,-57.6
BA24: BANK_15.6 U1.BA24 | length 37.3
  Top Layer 1 w0.14: U1.BA24@1.5,-27 1.99,-26.51 5.851,-26.51 5.99,-26.649 5.99,-30.9
  Top Layer 1 w0.254: 5.99,-30.9 5.99,-40.99 15.98,-50.98 BANK_15.6@15.98,-55.06
BA25: BANK_15.4 U1.BA25 | length 33.9
  Top Layer 1 w0.14: U1.BA25@2.5,-27 2.99,-27.49 4.851,-27.49 4.99,-27.629 4.99,-30.9
  Top Layer 1 w0.254: 4.99,-30.9 4.99,-46.99 12.704,-54.704 12.747,-54.704 13.103,-55.06 BANK_15.4@13.44,-55.06
BA26: BANK_15.16 U1.BA26 | length 51.4
  IN_Layer 10 w0.14: U1.BA26@3.5,-27 4,-26.5 22.3,-26.5
  IN_Layer 10 w0.254: 22.3,-26.5 24.25,-26.5 28.68,-30.93 BANK_15.16@28.68,-55.06
BA28: BANK_14.9 U1.BA28 | length 56.6
  IN_Layer 9 w0.14: U1.BA28@5.5,-27 5.583,-27 6.083,-27.5 22.3,-27.5
  IN_Layer 9 w0.254: 22.3,-27.5 41.56,-27.5 BANK_14.9@55.96,-13.1
BA30: BANK_14.21 U1.BA30 | length 69.9
  IN_Layer 8 w0.14: U1.BA30@7.5,-27 8,-27.5 22.3,-27.5
  IN_Layer 8 w0.254: 22.3,-27.5 26.678,-27.5 32.301,-21.877 62.423,-21.877 BANK_14.21@71.2,-13.1
BA31: BANK_14.49 U1.BA31 | length 131
  IN_Layer 7 w0.14: 4.99,-30.9 4.99,-27.572 5.072,-27.49 8.01,-27.49 U1.BA31@8.5,-27
  IN_Layer 7 w0.254: 4.99,-30.9 4.99,-31.24 10.154,-36.404 100.602,-36.404 100.759,-36.247 103,-34.006 103,-16.86 BANK_14.49@106.76,-13.1
BA33: BANK_16.9 U1.BA33 | length 46.8
  Bottom Layer w0.14: U1.BA33@10.5,-27 11.01,-27.51 12.76,-27.51 13.01,-27.76 13.01,-28.203 13.297,-28.49 13.74,-28.49 13.75,-28.5 22.3,-28.5
  Bottom Layer w0.254: 22.3,-28.5 54.86,-28.5 BANK_16.9@55.96,-29.6
BA34: BANK_16.31 U1.BA34 | length 80.6
  IN_Layer 6 w0.14: U1.BA34@11.5,-27 11.99,-27.49 12.683,-27.49 13.01,-27.817 13.01,-30.9
  IN_Layer 6 w0.254: 13.01,-30.9 13.01,-32.26 15.75,-35 78.5,-35 BANK_16.31@83.9,-29.6
BA35: BANK_16.43 U1.BA35 U4.A5 | length 105.7
  Top Layer 1 w0.14: U1.BA35@12.5,-27 13.01,-27.51 14.76,-27.51 15.01,-27.76 15.01,-30.9
  Top Layer 1 w0.254: 15.01,-30.9 15.01,-32.026 17.984,-35 93.74,-35 BANK_16.43@99.14,-29.6
  Bottom Layer w0.254: BANK_16.43@99.14,-29.6 104.075,-34.535 U4.A5@104.075,-38.55
BB10: BANK_36.7 U1.BB10 U2.A4 | length 103.7
  Top Layer 1 w0.14: -14,-30.9 -14,-28.807 -13.703,-28.51 -13.01,-28.51 U1.BB10@-12.5,-28
  Top Layer 1 w0.254: BANK_36.7@-99.08,-29.6 -99.08,-30.67 -94.752,-34.998 -16.629,-34.998 -14,-32.369 -14,-30.9
  Bottom Layer w0.254: U2.A4@-99.825,-38.55 -99.825,-30.454 -99.08,-29.709 BANK_36.7@-99.08,-29.6
BB11: BANK_36.25 U1.BB11 | length 71.8
  IN_Layer 6 w0.14: -22.1,-28.85 -21.74,-28.49 -12.051,-28.49 -11.561,-28 U1.BB11@-11.5,-28
  IN_Layer 6 w0.254: BANK_36.25@-76.22,-29.6 -76.22,-32.14 -74.54,-33.82 -72.86,-35.5 -28.75,-35.5 -22.1,-28.85
BB12: BANK_36.50 U1.BB12 | length 36
  Bottom Layer w0.14: -22.1,-28.49 -10.99,-28.49 U1.BB12@-10.5,-28
  Bottom Layer w0.254: BANK_36.50@-45.74,-27.06 -44.31,-28.49 -22.1,-28.49
BB13: BANK_36.45 U1.BB13 | length 51.3
  Bottom Layer w0.14: U1.BB13@-9.5,-28 -9,-28.5 -9,-30.9
  Bottom Layer w0.254: BANK_36.45@-50.82,-29.6 -50.82,-32.18 -48,-35 -11.5,-35 -9,-32.5 -9,-30.9
BB15: BANK_34.5 U1.BB15 | length 100.7
  IN_Layer 7 w0.14: -22.1,-28.5 -8,-28.5 U1.BB15@-7.5,-28
  IN_Layer 7 w0.254: BANK_34.5@-101.62,-13.1 -90.218,-24.502 -26.235,-24.502 -25.068,-25.67 -22.237,-28.5 -22.1,-28.5
BB16: BANK_34.6 U1.BB16 | length 104.9
  IN_Layer 8 w0.14: -22.1,-27.15 -21.76,-27.49 -7.01,-27.49 U1.BB16@-6.5,-28
  IN_Layer 8 w0.254: BANK_34.6@-101.62,-10.56 -100.25,-11.93 -100.25,-16.25 -94.5,-22 -27.25,-22 -22.1,-27.15
BB17: BANK_34.47 U1.BB17 | length 49
  IN_Layer 9 w0.14: -22.1,-27.49 -6.01,-27.49 U1.BB17@-5.5,-28
  IN_Layer 9 w0.254: BANK_34.47@-48.28,-13.1 -33.89,-27.49 -22.1,-27.49
BB18: BANK_34.45 U1.BB18 | length 52.9
  IN_Layer 9 w0.14: -22.1,-28.49 -4.99,-28.49 U1.BB18@-4.5,-28
  IN_Layer 9 w0.254: BANK_34.45@-50.82,-13.1 -35.43,-28.49 -22.1,-28.49
BB20: BANK_35.15 U1.BB20 | length 71.4
  IN_Layer 10 w0.14: -22.1,-28.49 -2.99,-28.49 U1.BB20@-2.5,-28
  IN_Layer 10 w0.254: BANK_35.15@-54.02,-57.6 -52.75,-56.33 -52.75,-43.25 -48.25,-38.75 -32.75,-38.75 -22.49,-28.49 -22.1,-28.49
BB21: BANK_35.45 U1.BB21 | length 35.6
  Bottom Layer w0.14: -2,-30.9 -2,-28.5 U1.BB21@-1.5,-28
  Bottom Layer w0.254: BANK_35.45@-15.92,-57.6 -14.75,-56.43 -14.75,-44.25 -2,-31.5 -2,-30.9
BB22: BANK_35.47 U1.BB22 | length 34.9
  Bottom Layer w0.14: -1,-30.9 -1,-28.5 U1.BB22@-0.5,-28
  Bottom Layer w0.254: BANK_35.47@-13.38,-57.6 -12.25,-56.47 -12.25,-42.75 -1,-31.5 -1,-30.9
BB23: BANK_15.11 U1.BB23 | length 58.6
  Bottom Layer w0.14: U1.BB23@0.5,-28 1,-28.5 1,-31.25
  Bottom Layer w0.254: 1,-31.25 1,-32.5 -3.5,-37 -3.5,-51.5 6.75,-61.75 19.45,-61.75 BANK_15.11@23.6,-57.6
BB25: BANK_15.2 U1.BB25 | length 31
  Top Layer 1 w0.14: U1.BB25@2.5,-28 2.99,-28.49 3.851,-28.49 3.99,-28.629 3.99,-30.9
  Top Layer 1 w0.254: 3.99,-30.9 3.99,-48.15 BANK_15.2@10.9,-55.06
BB26: BANK_15.14 U1.BB26 | length 49.2
  IN_Layer 10 w0.14: U1.BB26@3.5,-28 4,-27.5 22.3,-27.5
  IN_Layer 10 w0.254: 22.3,-27.5 24,-27.5 26.14,-29.64 BANK_15.14@26.14,-55.06
BB28: BANK_14.25 U1.BB28 | length 77.4
  IN_Layer 8 w0.14: U1.BB28@5.5,-28 6,-28.5 22.3,-28.5
  IN_Layer 8 w0.254: 22.3,-28.5 26.322,-28.5 32.344,-22.478 66.902,-22.478 BANK_14.25@76.28,-13.1
BB30: BANK_14.45 U1.BB30 | length 121.7
  IN_Layer 7 w0.14: 6.01,-30.9 6.01,-28.797 6.297,-28.51 6.99,-28.51 U1.BB30@7.5,-28
  IN_Layer 7 w0.254: 6.01,-30.9 6.01,-31.26 10.623,-35.873 96.627,-35.873 100.137,-32.363 100.137,-14.643 BANK_14.45@101.68,-13.1
BB31: BANK_16.1 U1.BB31 | length 38
  IN_Layer 7 w0.14: U1.BB31@8.5,-28 9.01,-28.51 22.3,-28.51
  IN_Layer 7 w0.254: 22.3,-28.51 44.71,-28.51 BANK_16.1@45.8,-29.6
BB32: BANK_16.11 U1.BB32 | length 52.7
  Bottom Layer w0.14: U1.BB32@9.5,-28 10.01,-28.51 11.703,-28.51 11.99,-28.797 11.99,-30.49 12.4,-30.9
  Bottom Layer w0.254: 12.4,-30.9 12.75,-31.25 58,-31.25 58.5,-30.75 BANK_16.11@58.5,-29.6
BB33: BANK_16.5 U1.BB33 | length 43.6
  IN_Layer 7 w0.14: U1.BB33@10.5,-28 11,-27.5 22,-27.5 22.3,-27.2
  IN_Layer 7 w0.254: 22.3,-27.2 23.437,-26.063 49.04,-26.063 49.75,-26.773 49.75,-28.47 BANK_16.5@50.88,-29.6
BB35: BANK_16.45 U1.BB35 U4.A6 | length 106.8
  Top Layer 1 w0.14: U1.BB35@12.5,-28 12.99,-28.49 13.74,-28.49 14.01,-28.76 14.01,-30.9
  Top Layer 1 w0.254: 14.01,-30.9 14.01,-32.01 17.5,-35.5 95.78,-35.5 BANK_16.45@101.68,-29.6
  Bottom Layer w0.254: BANK_16.45@101.68,-29.6 104.725,-32.645 U4.A6@104.725,-38.55
BC10: BANK_36.5 U1.BC10 U2.A3 | length 105.2
  Top Layer 1 w0.14: -13,-30.9 -13,-29.5 U1.BC10@-12.5,-29
  Top Layer 1 w0.254: BANK_36.5@-101.642,-29.622 -95.766,-35.498 -16.498,-35.498 -13,-32 -13,-30.9
  Bottom Layer w0.254: BANK_36.5@-101.62,-29.6 -100.475,-30.745 U2.A3@-100.475,-38.55
BC12: BANK_36.23 U1.BC12 | length 75.5
  IN_Layer 6 w0.14: -22.1,-29.907 -21.683,-29.49 -10.99,-29.49 U1.BC12@-10.5,-29
  IN_Layer 6 w0.254: BANK_36.23@-78.76,-29.6 -78.76,-32.14 -74.65,-36.25 -28.443,-36.25 -22.1,-29.907
BC13: BANK_36.47 U1.BC13 | length 46.7
  Bottom Layer w0.14: -10,-30.9 -10,-29.5 U1.BC13@-9.5,-29
  Bottom Layer w0.254: BANK_36.47@-48.28,-29.6 -48.25,-29.63 -48.25,-32.5 -46.25,-34.5 -11.75,-34.5 -10,-32.75 -10,-30.9
BC14: BANK_36.41 U1.BC14 | length 57.1
  Bottom Layer w0.14: U1.BC14@-8.5,-29 -8.01,-29.49 -8.01,-30.9
  Bottom Layer w0.254: BANK_36.41@-55.9,-29.6 -55.9,-31.35 -51.25,-36 -10.844,-36 -8.01,-33.166 -8.01,-30.9
BC15: BANK_34.3 U1.BC15 | length 103.7
  IN_Layer 7 w0.14: -22.1,-29.51 -8.01,-29.51 U1.BC15@-7.5,-29
  IN_Layer 7 w0.254: BANK_34.3@-104.16,-13.1 -92.384,-24.876 -27.124,-24.876 -22.49,-29.51 -22.1,-29.51
BC17: BANK_34.43 U1.BC17 | length 58
  IN_Layer 9 w0.14: -6,-30.9 -6,-29.5 U1.BC17@-5.5,-29
  IN_Layer 9 w0.254: BANK_34.43@-53.36,-13.1 -34.21,-32.25 -7.25,-32.25 -6,-31 -6,-30.9
BC18: BANK_34.41 U1.BC18 | length 61.8
  IN_Layer 9 w0.14: -5.15,-30.9 -5.01,-30.76 -5.01,-29.51 U1.BC18@-4.5,-29
  IN_Layer 9 w0.254: BANK_34.41@-55.9,-13.1 -36.25,-32.75 -7,-32.75 -5.15,-30.9
BC19: BANK_34.39 U1.BC19 | length 65.6
  IN_Layer 9 w0.14: -4.4,-30.9 -4.01,-30.51 -4.01,-29.51 U1.BC19@-3.5,-29
  IN_Layer 9 w0.254: BANK_34.39@-58.44,-13.1 -46.29,-25.25 -45.5,-25.25 -37.5,-33.25 -6.75,-33.25 -4.4,-30.9
BC20: BANK_35.17 U1.BC20 | length 61.8
  IN_Layer 10 w0.14: -22.1,-29.907 -21.688,-29.495 -3.745,-29.495 -3.74,-29.49 -2.99,-29.49 U1.BC20@-2.5,-29
  IN_Layer 10 w0.254: BANK_35.17@-51.48,-57.6 -50.25,-56.37 -50.25,-54.75 -43,-47.5 -39.693,-47.5 -22.1,-29.907
BC22: BANK_35.21 U1.BC22 | length 59.5
  IN_Layer 10 w0.14: -1.4,-30.9 -1.01,-30.51 -1.01,-29.51 U1.BC22@-0.5,-29
  IN_Layer 10 w0.254: BANK_35.21@-46.4,-57.6 -45,-56.2 -45,-54.25 -39.5,-48.75 -38,-48.75 -31,-41.75 -12.25,-41.75 -1.4,-30.9
BC23: BANK_15.5 U1.BC23 | length 42.5
  Top Layer 1 w0.14: U1.BC23@0.5,-29 0.99,-29.49 0.99,-30.9
  Top Layer 1 w0.254: 0.99,-30.9 0.99,-33.232 0.353,-33.869 0.353,-51.853 7.5,-59 14.58,-59 BANK_15.5@15.98,-57.6
BC24: BANK_15.1 U1.BC24 | length 34
  Top Layer 1 w0.14: U1.BC24@1.5,-29 2,-29.5 2,-30.9
  Top Layer 1 w0.254: 2,-30.9 2,-51.25 8.35,-57.6 BANK_15.1@10.9,-57.6
BC25: BANK_15.3 U1.BC25 | length 35.1
  Top Layer 1 w0.14: U1.BC25@2.5,-29 3,-29.5 3,-30.9
  Top Layer 1 w0.254: 3,-30.9 3,-50.5 8.75,-56.25 12.09,-56.25 BANK_15.3@13.44,-57.6
BC28: BANK_14.16 U1.BC28 | length 67.9
  IN_Layer 9 w0.14: U1.BC28@5.5,-29 5.99,-29.49 22.3,-29.49
  IN_Layer 9 w0.254: 22.3,-29.49 41.76,-29.49 54.25,-17 60.25,-17 62.25,-15 62.25,-11.89 BANK_14.16@63.58,-10.56
BC29: BANK_14.27 U1.BC29 | length 79.3
  IN_Layer 8 w0.14: U1.BC29@6.5,-29 7,-29.5 22.3,-29.5
  IN_Layer 8 w0.254: 22.3,-29.5 25.967,-29.5 32.606,-22.861 69.059,-22.861 BANK_14.27@78.82,-13.1
BC30: BANK_14.43 U1.BC30 | length 116.1
  IN_Layer 7 w0.14: 7.01,-30.9 7.01,-29.49 U1.BC30@7.5,-29
  IN_Layer 7 w0.254: 7.01,-30.9 7.01,-31.26 11,-35.25 95.25,-35.25 97.971,-32.529 97.971,-14.269 BANK_14.43@99.14,-13.1
BC32: BANK_16.15 U1.BC32 | length 58.4
  Bottom Layer w0.14: U1.BC32@9.5,-29 10.01,-29.51 10.01,-30.742 10.168,-30.9
  Bottom Layer w0.254: 10.168,-30.9 12.024,-32.756 61.726,-32.756 63.58,-30.902 BANK_16.15@63.58,-29.6
BC33: BANK_16.13 U1.BC33 | length 54.2
  Bottom Layer w0.14: U1.BC33@10.5,-29 11.01,-29.51 11.01,-30.529 11.381,-30.9
  Bottom Layer w0.254: 11.381,-30.9 12.481,-32 60,-32 61.04,-30.96 BANK_16.13@61.04,-29.6
BC34: BANK_16.33 U1.BC34 | length 81.7
  IN_Layer 6 w0.14: U1.BC34@11.5,-29 11.5,-29.123 12.01,-29.633 12.01,-30.9
  IN_Layer 6 w0.254: 12.01,-30.9 12.01,-32.26 15.25,-35.5 80.54,-35.5 BANK_16.33@86.44,-29.6
BC35: BANK_16.47 U1.BC35 U4.A7 | length 108
  Top Layer 1 w0.14: U1.BC35@12.5,-29 13.01,-29.51 13.01,-30.9
  Top Layer 1 w0.254: 13.01,-30.9 13.01,-31.76 17.25,-36 97.82,-36 BANK_16.47@104.22,-29.6
  Bottom Layer w0.254: BANK_16.47@104.22,-29.6 105.375,-30.755 U4.A7@105.375,-38.55
BD10: BANK_36.3 U1.BD10 U2.A2 | length 108.4
  Top Layer 1 w0.14: -12.5,-30.9 U1.BD10@-12.5,-30
  Top Layer 1 w0.254: BANK_36.3@-104.206,-29.598 -97.806,-35.998 -16.248,-35.998 -12.5,-32.25 -12.5,-30.9
  Bottom Layer w0.254: BANK_36.3@-104.16,-29.6 -101.125,-32.635 U2.A2@-101.125,-38.55
BD11: BANK_36.21 U1.BD11 | length 77.9
  IN_Layer 6 w0.14: -11.9,-30.9 -11.5,-30.5 U1.BD11@-11.5,-30
  IN_Layer 6 w0.254: BANK_36.21@-81.3,-29.6 -81.3,-32.14 -76.003,-37.437 -18.437,-37.437 -11.9,-30.9
BD12: BANK_36.49 U1.BD12 | length 41.4
  Bottom Layer w0.254: BANK_36.49@-45.74,-29.6 -45.74,-32.01 -43.776,-33.974 -12.224,-33.974 -10.5,-32.25 U1.BD12@-10.5,-30
BD14: BANK_36.43 U1.BD14 | length 52.4
  Bottom Layer w0.14: -8.5,-30.9 U1.BD14@-8.5,-30
  Bottom Layer w0.254: BANK_36.43@-53.36,-29.6 -53.36,-31.64 -49.5,-35.5 -11.25,-35.5 -8.5,-32.75 -8.5,-30.9
BD15: BANK_34.1 U1.BD15 | length 107.6
  IN_Layer 7 w0.14: -8.4,-30.9 U1.BD15@-7.5,-30
  IN_Layer 7 w0.254: BANK_34.1@-106.7,-13.1 -94.55,-25.25 -28.25,-25.25 -21.75,-31.75 -9.25,-31.75 -8.4,-30.9
BD16: BANK_34.2 U1.BD16 | length 109.9
  IN_Layer 8 w0.14: -22.1,-29.093 -21.703,-29.49 -7.01,-29.49 U1.BD16@-6.5,-30
  IN_Layer 8 w0.254: BANK_34.2@-106.7,-10.56 -105.5,-11.76 -105.5,-14.5 -97,-23 -28.193,-23 -22.1,-29.093
BD17: BANK_34.4 U1.BD17 | length 109.2
  IN_Layer 8 w0.14: -22.1,-28.093 -21.703,-28.49 -6.26,-28.49 -6,-28.75 -6,-29.5 U1.BD17@-5.5,-30
  IN_Layer 8 w0.254: BANK_34.4@-104.16,-10.56 -102.89,-11.83 -102.89,-15.36 -95.75,-22.5 -27.693,-22.5 -22.1,-28.093
BD19: BANK_35.33 U1.BD19 | length 43.6
  Top Layer 1 w0.14: -3.5,-31.25 U1.BD19@-3.5,-30
  Top Layer 1 w0.254: BANK_35.33@-31.16,-57.6 -29.89,-56.33 -29.89,-49.89 -20.75,-40.75 -13,-40.75 -3.5,-31.25
BD20: BANK_35.35 U1.BD20 | length 42.8
  Top Layer 1 w0.14: -2.5,-31.25 U1.BD20@-2.5,-30
  Top Layer 1 w0.254: BANK_35.35@-28.62,-57.6 -27.25,-56.23 -27.25,-48.5 -20.25,-41.5 -12.75,-41.5 -2.5,-31.25
BD21: BANK_35.37 U1.BD21 | length 42
  Top Layer 1 w0.14: -1.5,-30.9 U1.BD21@-1.5,-30
  Top Layer 1 w0.254: BANK_35.37@-26.08,-57.6 -25,-56.52 -25,-47.5 -19.75,-42.25 -12.5,-42.25 -1.5,-31.25 -1.5,-30.9
BD22: BANK_35.23 U1.BD22 | length 56.1
  IN_Layer 10 w0.14: -0.65,-30.9 -0.5,-30.75 U1.BD22@-0.5,-30
  IN_Layer 10 w0.254: BANK_35.23@-43.86,-57.6 -42.5,-56.24 -42.5,-54.75 -30.007,-42.257 -12.007,-42.257 -0.65,-30.9
BD24: BANK_15.21 U1.BD24 | length 65.1
  IN_Layer 10 w0.14: 1.5,-30.9 U1.BD24@1.5,-30
  IN_Layer 10 w0.254: 1.5,-30.9 1.5,-34 0.353,-35.147 0.353,-54.353 7.25,-61.25 32.65,-61.25 BANK_15.21@36.3,-57.6
BD25: BANK_15.17 U1.BD25 | length 57.1
  IN_Layer 10 w0.14: 2.5,-30.9 U1.BD25@2.5,-30
  IN_Layer 10 w0.254: 2.5,-30.9 2.5,-54.919 8.071,-60.491 28.329,-60.491 BANK_15.17@31.22,-57.6
BD26: BANK_15.13 R26.2 U1.BD26 | length 59.2
  IN_Layer 10 w0.14: 3.5,-30.9 U1.BD26@3.5,-30
  IN_Layer 10 w0.254: 3.5,-30.9 3.5,-32.311 3.5,-54.5 8.743,-59.743 23.997,-59.743 BANK_15.13@26.14,-57.6
  Bottom Layer w0.254: R26.2@22.75,-65.1 22.975,-65.1 26.14,-61.935 BANK_15.13@26.14,-57.6
BD29: BANK_14.29 U1.BD29 | length 82.5
  IN_Layer 8 w0.14: U1.BD29@6.5,-30 6.526,-30 7.276,-30.75 22.3,-30.75
  IN_Layer 8 w0.254: 22.3,-30.75 25.362,-30.75 32.758,-23.353 71.107,-23.353 BANK_14.29@81.36,-13.1
BD30: BANK_14.41 U1.BD30 | length 110.3
  IN_Layer 7 w0.14: U1.BD30@7.5,-30 8.4,-30.9
  IN_Layer 7 w0.254: 8.4,-30.9 12,-34.5 93.11,-34.5 95.25,-32.36 95.25,-14.45 BANK_14.41@96.6,-13.1
BD31: BANK_16.3 U1.BD31 | length 40.8
  IN_Layer 7 w0.14: U1.BD31@8.5,-30 9.4,-30.9
  IN_Layer 7 w0.254: 9.4,-30.9 9.5,-31 46.94,-31 BANK_16.3@48.34,-29.6
BD32: BANK_16.17 U1.BD32 | length 60.4
  Bottom Layer w0.14: 9.5,-30.9 U1.BD32@9.5,-30
  Bottom Layer w0.254: 9.5,-30.9 9.5,-31.25 11.75,-33.5 62.22,-33.5 BANK_16.17@66.12,-29.6
BD34: BANK_16.35 U1.BD34 U4.A1 | length 100.1
  IN_Layer 6 w0.14: 11.5,-30.9 U1.BD34@11.5,-30
  IN_Layer 6 w0.254: 11.5,-30.9 11.5,-32.75 14.75,-36 82.58,-36 BANK_16.35@88.98,-29.6
  Bottom Layer w0.254: BANK_16.35@88.98,-29.6 93.318,-33.938 96.688,-33.938 100.825,-38.075 U4.A1@100.825,-38.55
BD35: BANK_16.49 U1.BD35 U4.A8 | length 110.2
  Top Layer 1 w0.14: 12.5,-30.9 U1.BD35@12.5,-30
  Top Layer 1 w0.254: 12.5,-30.9 12.5,-32 17,-36.5 99.86,-36.5 BANK_16.49@106.76,-29.6
  Bottom Layer w0.254: U4.A8@106.025,-38.55 106.025,-30.464 106.76,-29.729 BANK_16.49@106.76,-29.6
C12: BANK_38.10 U1.C12 | length 98.7
  Top Layer 1 w0.14: -10.99,14 -10.99,11.49 U1.C12@-10.5,11
  Top Layer 1 w0.254: BANK_38.10@-96.54,22.34 -91.13,27.75 -21.25,27.75 -10.99,17.49 -10.99,14
C13: BANK_38.30 U1.C13 | length 81.3
  IN_Layer 6 w0.14: -10.99,14 -10.99,11.797 -10.703,11.51 -10.01,11.51 U1.C13@-9.5,11
  IN_Layer 6 w0.254: BANK_38.30@-71.14,22.34 -71.14,27.36 -67.25,31.25 -22.5,31.25 -10.99,19.74 -10.99,14
C14: BANK_38.26 U1.C14 | length 89.7
  IN_Layer 6 w0.14: -9,14 -9,11.5 U1.C14@-8.5,11
  IN_Layer 6 w0.254: BANK_38.26@-76.22,22.34 -76.22,27.53 -70.75,33 -21.25,33 -9,20.75 -9,14
C15: BANK_38.44 U1.C15 | length 58.1
  IN_Layer 7 w0.14: U1.C15@-7.5,11 -7.01,11.49 -7.01,14
  IN_Layer 7 w0.254: BANK_38.44@-53.36,22.34 -48.95,26.75 -17.247,26.75 -7.01,16.513 -7.01,14
C17: BANK_39.6 U1.C17 | length 99.5
  IN_Layer 8 w0.14: -22,11.75 -21.74,11.49 -5.99,11.49 U1.C17@-5.5,11
  IN_Layer 8 w0.254: BANK_39.6@-101.62,5.84 -94.96,12.5 -22.75,12.5 -22,11.75
C18: BANK_39.38 U1.C18 | length 59
  IN_Layer 9 w0.14: -22.1,11.49 -4.99,11.49 U1.C18@-4.5,11
  IN_Layer 9 w0.254: BANK_39.38@-60.98,5.84 -55.33,11.49 -22.1,11.49
C19: BANK_39.28 U1.C19 | length 80.9
  IN_Layer 9 w0.14: U1.C19@-3.5,11 -3.001,11.499 -2.308,11.499 -2.01,11.797 -2.01,14
  IN_Layer 9 w0.254: BANK_39.28@-73.68,5.84 -63.646,15.874 -3.374,15.874 -2.01,14.51 -2.01,14
C20: BANK_37.39 U1.C20 | length 49.1
  IN_Layer 10 w0.14: -22.1,11.5 -3,11.5 U1.C20@-2.5,11
  IN_Layer 10 w0.254: BANK_37.39@-23.54,37.8 -23.54,25.376 -25.5,23.416 -25.5,13.5 -23.5,11.5 -22.1,11.5
C22: BANK_37.48 U1.C22 | length 38.6
  Top Layer 1 w0.14: U1.C22@-0.5,11 0,11.5 0,14
  Top Layer 1 w0.254: BANK_37.48@-13.38,40.34 -12.11,39.07 -12.11,36.36 -11.25,35.5 -5.25,35.5 0,30.25 0,14
C23: BANK_17.5 U1.C23 | length 33.2
  IN_Layer 6 w0.14: U1.C23@0.5,11 1,11.5 1,14
  IN_Layer 6 w0.254: 1,14 1,16.25 15.98,31.23 BANK_17.5@15.98,37.8
C24: BANK_17.6 U1.C24 | length 35.3
  IN_Layer 10 w0.14: U1.C24@1.5,11 2,11.5 2,14
  IN_Layer 10 w0.254: 2,14 2,18.75 14.75,31.5 14.75,39.11 BANK_17.6@15.98,40.34
C25: BANK_17.12 U1.C25 | length 38.5
  IN_Layer 10 w0.14: U1.C25@2.5,11 2.99,11.49 3.683,11.49 4,11.807 4,14
  IN_Layer 10 w0.254: 4,14 4,16.5 22.25,34.75 22.25,38.99 BANK_17.12@23.6,40.34
C27: BANK_19.10 U1.C27 | length 53.6
  IN_Layer 9 w0.14: U1.C27@4.5,11 5.01,10.49 22.3,10.49
  IN_Layer 9 w0.254: 22.3,10.49 51.31,10.49 BANK_19.10@55.96,5.84
C28: BANK_19.27 U1.C28 | length 81.1
  IN_Layer 8 w0.14: U1.C28@5.5,11 6,11.5 22.29,11.5
  IN_Layer 8 w0.254: 22.29,11.5 75.71,11.5 80.21,7 80.21,4.69 BANK_19.27@78.82,3.3
C29: BANK_19.26 U1.C29 | length 72.3
  IN_Layer 7 w0.14: U1.C29@6.5,11 7,11.5 22.3,11.5
  IN_Layer 7 w0.254: 22.3,11.5 70.62,11.5 BANK_19.26@76.28,5.84
C30: BANK_18.14 U1.C30 | length 71.3
  Bottom Layer w0.14: U1.C30@7.5,11 7,11.5 7,13.25 7.75,14
  Bottom Layer w0.254: 7.75,14 9,15.25 24.5,15.25 41.25,32 56.62,32 61.04,27.58 BANK_18.14@61.04,22.34